# Altium PCB ScopeMag.PcbDoc
Units mil, origin at the board's own origin, x right, y up, seen from the top; angles counter-clockwise.
Board outline 2500 x 1900 mil, 2 copper layers (Top Layer, Bottom Layer); 46 components, 27 nets, 117 pads, 38 vias.
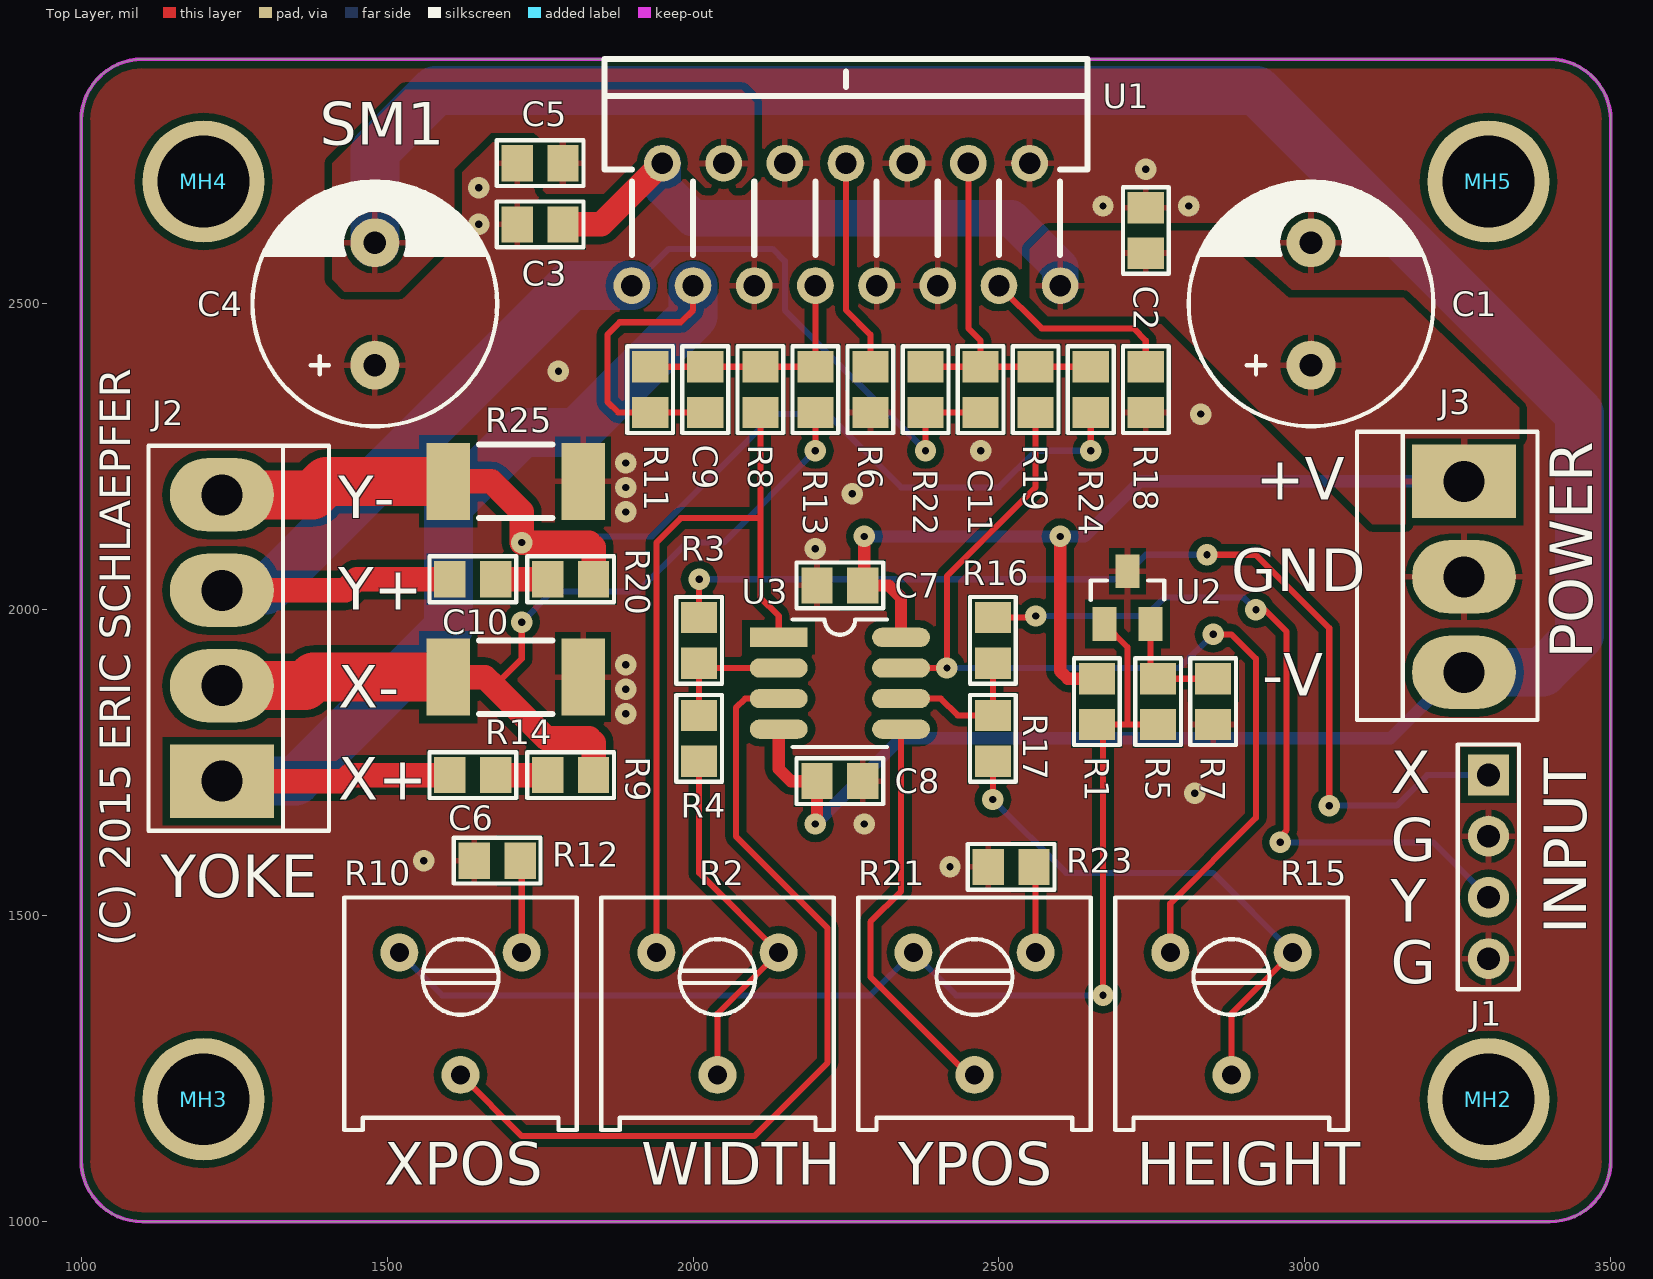
[diagram p0: Top Layer view]
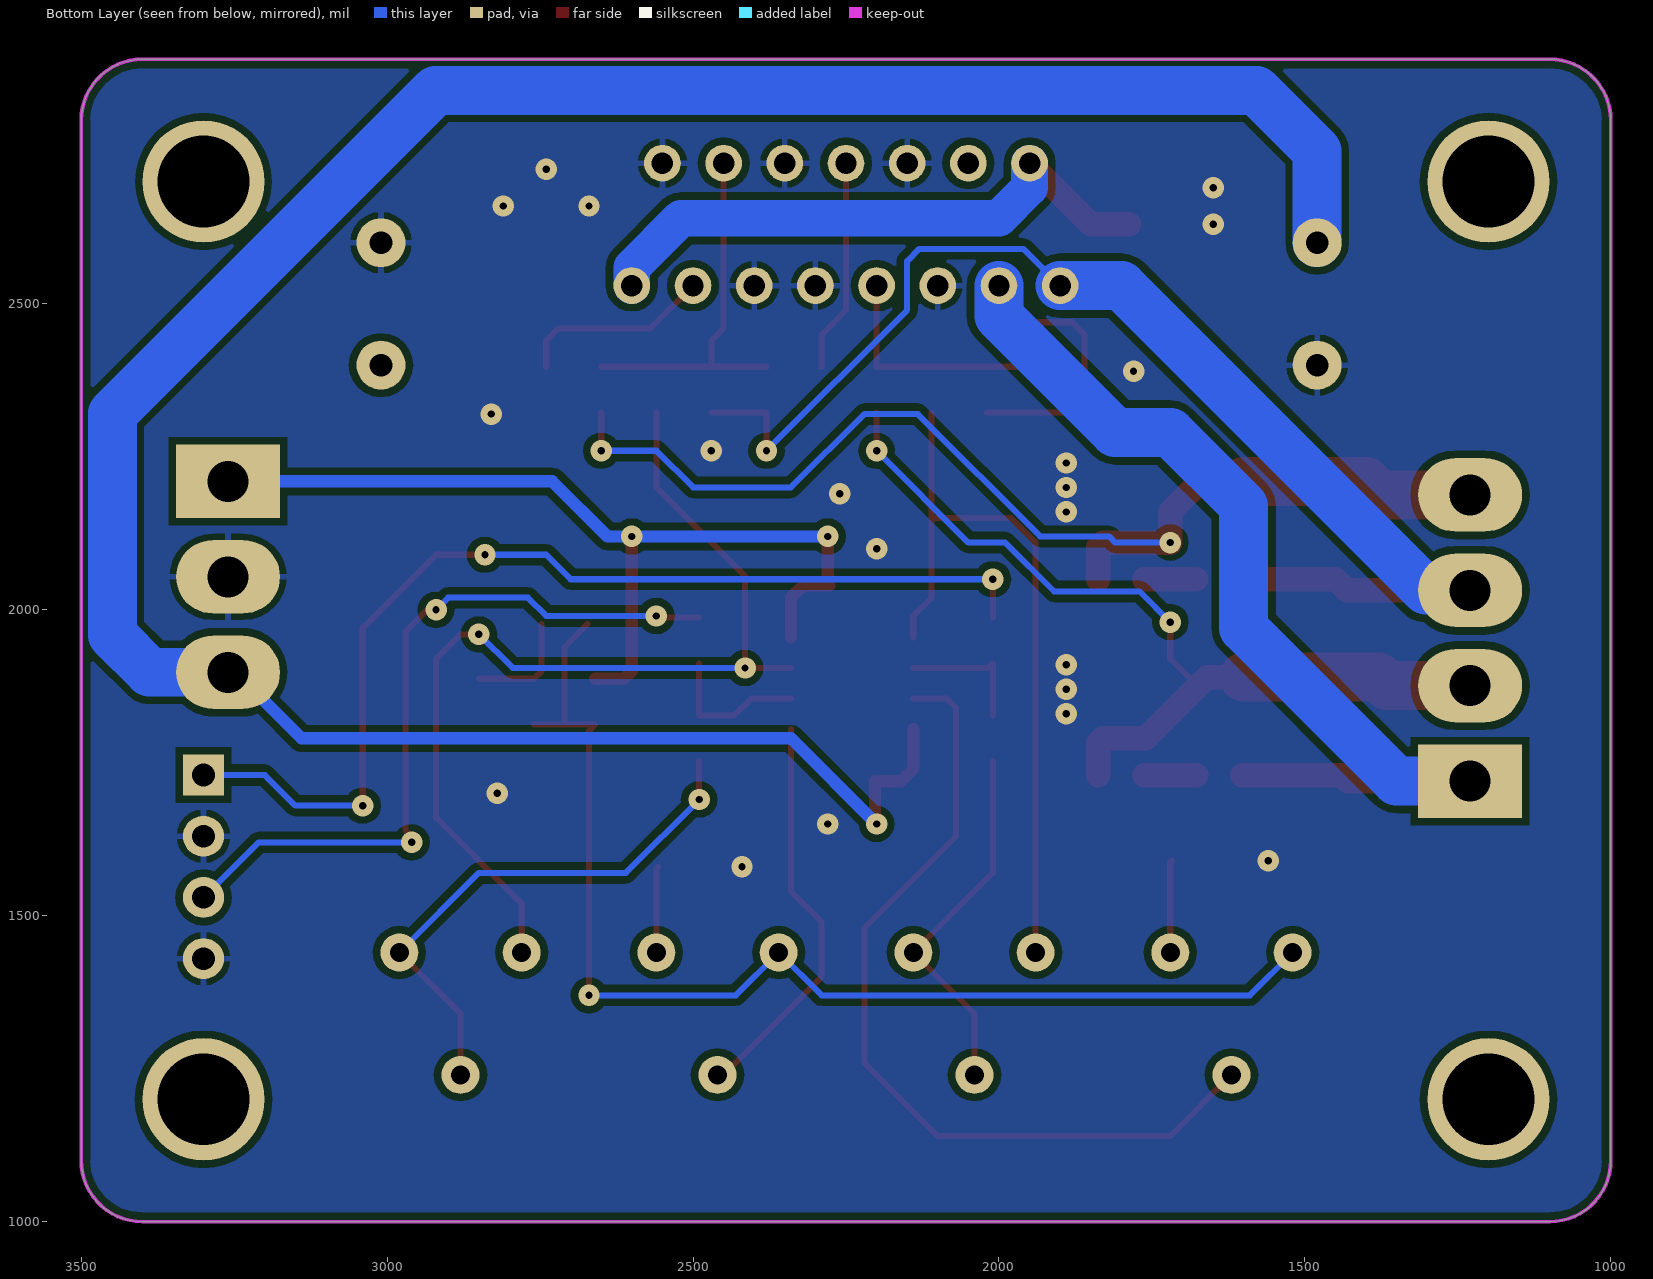
[diagram p1: Bottom Layer view, seen from below]

## Layer stack, top to bottom
Top Solder: solder mask 0.4, Solder Resist, Dk 3.5
Top Layer: signal copper 1.4
Dielectric 1: dielectric 12.6, FR-4, Dk 4.8
Bottom Layer: signal copper 1.4
Bottom Solder: solder mask 0.4, Solder Resist, Dk 3.5

## Board outline
1000,1100 1000,2800 cw(c1100,2800) 1100,2900 3400,2900 cw(c3400,2800) 3500,2800 3500,1100 cw(c3400,1100) 3400,1000 1100,1000 cw(c1100,1100)

## Design rules (kind name [scope] priority, off if disabled: settings)
Clearance Clearance_1 [(InPoly)] p1: gap=12
Clearance Clearance_HV [InNetClass('HV')] p2: gap=80
Clearance [All] p3: gap=8
HoleSize [All] p1: absolutevalues=TRUE maxlimit=150 minlimit=12 maxpercent=80.000 minpercent=20.000
PolygonConnect [InComponent('Q3') or InComponent('Q4') or InComponent('Q5') or InComponent('Q6') or IsVia] p1: connectstyle=Direct reliefconductorwidth=10 reliefentries=4 polygonreliefangle="90 Angle" airgapwidth=10
PolygonConnect PolygonConnect_1 [All] p2: connectstyle=Relief reliefconductorwidth=10 reliefentries=4 polygonreliefangle="90 Angle" airgapwidth=10
RoutingVias [All] p1: holewidth=12 width=35 viastyle="Through Hole" minholewidth=12 minwidth=35 maxholewidth=28 maxwidth=50
ShortCircuit [InComponent('JP1')] p1: allowed=FALSE
ShortCircuit ShortCircuit_1 [All] p2: allowed=FALSE
SolderMaskExpansion [All] p1: expansion=4
Width [All] p1: maxlimit=100 minlimit=10 preferedwidth=10 minimp=50.000000 maximp=50.000000 favimp=50.000000
27 further rules are at their usual default settings.

## Classes and differential pairs
component class ScopeMag: C1 C2 C3 C4 C5 C6 C7 C8 C9 C10 C11 J1 J2 J3 R1 R2 R3 R4 R5 R6 R7 R8 R9 R10 R11 R12 R13 R14 R15 R16 R17 R18 R19 R20 R21 R22 R23 R24 R25 U1 U2 U3

## Components (designator, comment, footprint, x,y, rotation, side; value= is the part's Value field where it differs from the comment)
C1 "Cap Pol2" CAP_R200x400 3010,2500 r90 top
C2 "Cap" G_0805[2012] 2740,2620 r270 top
C3 "Cap" G_0805[2012] 1750,2630 r0 top
C4 "Cap Pol2" CAP_R200x400 1480,2500 r90 top
C5 "Cap" G_0805[2012] 1750,2730 r0 top
C6 "Cap" G_0805[2012] 1640,1730 r180 top
C7 "Cap" G_0805[2012] 2240,2040 r0 top
C8 "Cap" G_0805[2012] 2240,1720 r0 top
C9 "Cap" G_0805[2012] 2020,2360 r90 top
C10 "Cap" G_0805[2012] 1640,2050 r180 top
C11 "Cap" G_0805[2012] 2470,2360 r90 top
J1 "CON4" HDR4S 3300,1730 r0 top
J2 "CON4" HDR4S156 1230,1720 r180 top
J3 "CON3" HDR3S156 3260,2210 r0 top
MH2 "Comment" M_MTHOLE 3300,1200 r0 top
MH3 "Comment" M_MTHOLE 1200,1200 r0 top
MH4 "Comment" M_MTHOLE 1200,2700 r0 top
MH5 "Comment" M_MTHOLE 3300,2700 r0 top
R1 "Res1" G_0805[2012] 2660,1850 r270 top
R2 "Pot" "POT_TRIM BOURNS 3386F" 2040,1340 r0 top
R3 "Res1" G_0805[2012] 2010,1950 r270 top
R4 "Res1" G_0805[2012] 2010,1790 r270 top
R5 "Res1" G_0805[2012] 2760,1850 r90 top
R6 "Res1" G_0805[2012] 2290,2360 r90 top
R7 "Res1" G_0805[2012] 2850,1850 r270 top
R8 "Res1" G_0805[2012] 2110,2360 r90 top
R9 "Res1" G_0805[2012] 1800,1730 r0 top
R10 "Pot" "POT_TRIM BOURNS 3386F" 1620,1340 r0 top
R11 "Res1" G_0805[2012] 1930,2360 r270 top
R12 "Res1" G_0805[2012] 1680,1590 r180 top
R13 "Res1" G_0805[2012] 2200,2360 r270 top
R14 "Res1" G_2512 1600,1890 r0 top
R15 "Pot" "POT_TRIM BOURNS 3386F" 2880,1340 r0 top
R16 "Res1" G_0805[2012] 2490,1950 r270 top
R17 "Res1" G_0805[2012] 2490,1790 r270 top
R18 "Res1" G_0805[2012] 2740,2360 r90 top
R19 "Res1" G_0805[2012] 2560,2360 r90 top
R20 "Res1" G_0805[2012] 1800,2050 r0 top
R21 "Pot" "POT_TRIM BOURNS 3386F" 2460,1340 r0 top
R22 "Res1" G_0805[2012] 2380,2360 r270 top
R23 "Res1" G_0805[2012] 2520,1580 r180 top
R24 "Res1" G_0805[2012] 2650,2360 r270 top
R25 "Res1" G_2512 1600,2210 r0 top
U1 "LM4765" LM4765 2250,2630 r0 top
U2 "TL431" G_SOT23 2710,2020 r0 top
U3 "OpAmpDual" G_SO8 2240,1880 r0 top

## Footprints (in the part's own frame and the unit in brackets; to place one, negate y for a bottom-side part, rotate by r counter-clockwise, add the part's x,y. Pads: shape width x height; smd on the part's side, far side on the other; paste and mask are expansions set on the pad)
CAP_R200x400 [mil]
  round 80 hole 37: 1(-100,0) 2(100,0)
  silkscreen extent -200,-200 200,200, body extent -200,-200 200,200, height 800
G_0805[2012] [mm] "Generic 0805"
  rect 1.3x1.5 smd: 1(-0.95,0) 2(0.95,0)
  silkscreen extent -1.8,-0.95 1.8,0.95, body extent -1,-0.6 1,0.6
G_2512 [mm]
  rect 1.8x3.2 smd: 1(0,0) 2(5.6,0)
  silkscreen extent 1.27,-1.52 4.32,1.52, body extent -0.38,-1.52 5.97,1.52
G_SO8 [mm]
  rect 2.4x0.8 smd: 1(-2.54,1.905)
  oval 2.4x0.8 smd: 2(-2.54,0.635) 3(-2.54,-0.635) 4(-2.54,-1.905) 5(2.54,-1.905) 6(2.54,-0.635) 7(2.54,0.635) 8(2.54,1.905)
  silkscreen extent -1.96,-2.64 1.96,2.65, body extent -2.03,-2.54 2.03,2.54
G_SOT23 [mm]
  rect 1x1.4 smd: 1(-0.95,-1.1) 2(0.95,-1.1) 3(0,1.1)
  silkscreen extent -1.52,-0.1 1.52,0.71, body extent -1.45,-0.64 1.45,0.64
HDR3S156 [mil]
  rect 170x120 hole 67: 1(0,0)
  oval 170x120 hole 67: 2(0,-156) 3(0,-312)
  silkscreen extent -175,-390 120,81
HDR4S [mil]
  rect 67x67 hole 37: 1(0,0)
  round 67 hole 37: 2(0,-100) 3(0,-200) 4(0,-300)
  silkscreen extent -50,-350 50,50
HDR4S156 [mil]
  rect 170x120 hole 67: 1(0,0)
  oval 170x120 hole 67: 2(0,-156) 3(0,-312) 4(0,-468)
  silkscreen extent -175,-548 120,81
LM4765 [mil] "15 pin SIP"
  round 60 hole 35: 1(-350,-100) 2(-300,100) 3(-250,-100) 4(-200,100) 5(-150,-100) 6(-100,100) 7(-50,-100) 8(0,100) 9(50,-100) 10(100,100) 11(150,-100) 12(200,100) 13(250,-100) 14(300,100) 15(350,-100)
  silkscreen extent -395,-50 395,270
M_MTHOLE [mil]
  round 200 hole 150: 1(0,0)
"POT_TRIM BOURNS 3386F" [mil]
  round 62 hole 31: 1(-100,100) 2(100,100) 3(0,-100)
  silkscreen extent -190,-190 190,190, body extent -190,-190 190,190

## Part data
C1 C4: library part CapP, "Polarized Capacitor"
C2 C3 C5 C6 C7 C8 C9 C10 C11: "Capacitor"
J1 J2: "Connector, 4 pin"
J3: "Connector, 3 pin"
R1 R3 R4 R5 R6 R7 R8 R9 R11 R12 R13 R14 R16 R17 R18 R19 R20 R22 R23 R24 R25: library part Res, "Resistor"
R2 R10 R15 R21: "Variable Resistor"
U2: "Adjustable Shunt Reg"
U3: "Generic Dual Op Amp"

## Via types
v1: diameter 35, hole 12, Top Layer to Bottom Layer, 38 vias

## Nets (pads, with @x,y where several pads share a name; then routed paths per layer and width w, separated by ;. In a path a pad name is that pad's centre, name@x,y a point inside that pad or via, vN(x,y) a via of type N, cw(c..) or ccw(c..) an arc to the next point about the centre after c; other vN are vias at no path point)
3V0: R1.2 R5.1 R10.1 R21.1 U2.1 | length 1963.3
  Top Layer w10: v1(2670,1370) 2670,1802.6 R1.2 2710,1812.6 ; U2.1 2710,1939.29 2710,1812.6 ; R5.1 2710,1812.6
  Bottom Layer w10: R10.1 1590,1370 2290,1370 R21.1 2430,1370 v1(2670,1370)
GND: C1.2 C2.1 C3.1 C4.1 C5.1 C7.1 C8.2 J1.2 J1.4 J3.2 R6.1 R7.2 R12.2 R14.2 R18.1 R23.2 R25.2 U1.5 U1.6 U1.9 U1.10 U1.11 U1.14 U2.3
  other v1: 2420,1580 1560,1590 2280,1650 2820,1700 1890,1830 1890,1870 1890,1910 2200,2100 1890,2160 2260,2190 1890,2200 1890,2240 2470,2260 2830,2320 1780,2390 1650,2630 2670,2660 2810,2660 1650,2690 2740,2720
NetC6_1: C6.1 R9.1 | length 85.2
  Top Layer w40: C6.1 R9.1
NetC6_2: C6.2 C9.1 J2.1 R11.2 U1.3 | length 2112.5
  Top Layer w10: U1.3 2000,2490 1980,2470 1880,2470 1860,2450 1860,2340 1877.4,2322.6 R11.2 C9.1
  Top Layer w40: J2.1 1430,1720 1440,1730 1470,1730 ; 1460,1730 C6.2
  Bottom Layer w80: J2.1 1350,1720 1600,1970 1600,2170 1720,2290 1810,2290 2000,2480 U1.3
NetC9_2: C9.2 R8.2 R11.1 R13.1 U1.7 | length 402.6
  Top Layer w10: R11.1 R13.1 U1.7
NetC10_1: C10.1 R20.1 | length 85.2
  Top Layer w40: C10.1 R20.1
NetC10_2: C10.2 C11.1 J2.3 R22.2 U1.1 | length 2097.3
  Top Layer w10: v1(2380,2260) R22.2 C11.1
  Top Layer w40: J2.3 1432,2032 1440,2040 1450,2050 C10.2
  Bottom Layer w10: U1.1 1960,2590 2130,2590 2150,2570 2150,2490 v1(2380,2260)
  Bottom Layer w80: J2.3 1302,2032 1800,2530 U1.1
NetC11_2: C11.2 R19.2 R22.1 R24.1 U1.12 | length 610.9
  Top Layer w10: R22.1 R24.1 ; U1.12 2450,2460 2470,2440 C11.2
NetJ1_1: J1.1 R3.1 | length 1739.7
  Top Layer w10: R3.1 v1(2010,2050) ; v1(2840,2090) 2920,2090 3039.75,1970.25 v1(3039.75,1680)
  Bottom Layer w10: v1@2010,2040 v1(2010,2050) 2700,2050 2740,2090 v1(2840,2090) ; v1(3039.75,1680) 3150,1680 3200,1730 J1.1
NetJ1_3: J1.3 R16.1 | length 1256.6
  Top Layer w10: R16.1 2557.4,1987.4 v1(2560,1990) ; v1(2920,2000) 2934.51,2000 2970,1964.51 2970,1640 v1@2950,1620
  Bottom Layer w10: v1(2560,1990) 2740,1990 2770,2020 2900,2020 v1(2920,2000) ; v1@2950,1620 3210,1620 J1.3
  other v1: 2960,1620
NetJ2_2: J2.2 R9.2 R13.2 R14.1 | length 1492.5
  Top Layer w10: 1675,1875 1720,1920 1720,1960 v1(1720,1980) ; v1(2200,2260) R13.2
  Top Layer w40: R14.1 1660,1890 1675,1875 1760,1790 1830,1790 1837.4,1782.6 R9.2
  Top Layer w80: J2.2 1366,1876 1380,1890 R14.1
  Bottom Layer w10: v1(1720,1980) 1770,2030 1910,2030 1990,2110 2050,2110 v1(2200,2260)
NetJ2_4: J2.4 R20.2 R24.2 R25.1 | length 1897
  Top Layer w10: v1(2650,2260) R24.2
  Top Layer w40: R25.1 1670,2210 1720,2160 v1(1720,2110) 1830,2110 1837.4,2102.6 R20.2
  Top Layer w80: J2.4 1378,2188 1400,2210 R25.1
  Bottom Layer w10: v1(1720,2110) 1810,2110 1820,2120 1932.5,2120 2132.5,2320 2220,2320 2340,2200 2500,2200 2560,2260 v1(2650,2260)
NetR2_1: R2.1 R8.1 U3.1 | length 1236.6
  Top Layer w10: R2.1 1940,2110 1980,2150 2110,2150 ; R8.1 2110,2020 2140,1990 U3.1
NetR2_2: R2.2 R2.3 R4.2 | length 607.9
  Top Layer w10: R4.2 2010,1570 R2.2 2040,1340 R2.3
NetR3_2: R3.2 R4.1 U3.2 | length 218.3
  Top Layer w10: R4.1 R3.2 2017.6,1905 U3.2
NetR5_2: R5.2 R7.1 U2.2 | length 184.5
  Top Layer w10: U2.2 2747.4,1900 R5.2 R7.1
NetR6_2: R6.2 U1.8 | length 349.2
  Top Layer w10: U1.8 2250,2490 2290,2450 R6.2
NetR10_2: R10.2 R12.1 | length 151.1
  Top Layer w10: R12.1 1720,1587.4 R10.2
NetR10_3: R10.3 U3.3 | length 1409.5
  Top Layer w10: R10.3 1720,1140 2100,1140 2220,1260 2220,1480 2070,1630 2070,1840 2085,1855 U3.3
NetR15_1: R15.1 R19.1 U3.7 | length 1649.1
  Top Layer w10: U3.7 v1(2415,1905) 2415,2055 2560,2200 R19.1 ; R15.1 2780,1520 2920,1660 2920,1920 2880,1960 v1(2850,1960)
  Bottom Layer w10: v1@2410,1910 v1@2420,1900 ; v1(2415,1905) 2795,1905 v1(2850,1960)
NetR15_2: R15.2 R15.3 R17.2 | length 897.6
  Top Layer w10: v1(2490,1690) R17.2 ; R15.3 2880,1340 R15.2
  Bottom Layer w10: v1(2490,1690) 2610,1570 2850,1570 R15.2
NetR16_2: R16.2 R17.1 U3.6 | length 246.6
  Top Layer w10: U3.6 2405,1855 2432.6,1827.4 R17.1 R16.2
NetR18_2: R18.2 U1.13 | length 319.9
  Top Layer w10: U1.13 2570,2460 2720,2460 2740,2440 R18.2
NetR21_2: R21.2 R23.1 | length 141.1
  Top Layer w10: R23.1 2560,1577.4 R21.2
NetR21_3: R21.3 U3.5 | length 662
  Top Layer w10: U3.5 2340,1540 2290,1490 2290,1400 2450,1240 R21.3
VCC: C1.1 C2.2 C3.2 C7.2 J3.1 R1.1 U1.2 U1.15 U3.8 | length 2497.3
  Top Layer w20: v1(2280,2120) 2280,2042.6 C7.2 2320,2040 2340,2020 U3.8 ; v1(2600,2120) 2600,1900 2612.6,1887.4 R1.1
  Top Layer w40: C3.2 1850,2630 U1.2
  Bottom Layer w20: v1(2280,2120) v1(2600,2120) 2640,2120 2730,2210 J3.1
  Bottom Layer w60: U1.2 1950,2690 2000,2640 2520,2640 2600,2560 U1.15
VEE: C4.2 C5.2 C8.1 J3.3 U1.4 U3.4 | length 4324.7
  Top Layer w20: U3.4 2140,1740 2160,1720 C8.1 2202.6,1652.6 v1(2200,1650)
  Bottom Layer w20: v1(2200,1650) 2340,1790 3140,1790 3248,1898 J3.3
  Bottom Layer w80: C4.2 1480,2750 1579,2849 2921,2849 3449,2321 3449,1959 3388,1898 J3.3
pads on no net: MH2.1 MH3.1 MH4.1 MH5.1

## Polygon pours and split planes (outlines as drawn)
VEE on Top Layer "VEE" (solid, pour order 4): 1430,2520 1520,2520 1610,2610 1610,2680 1610,2720 1670,2780 1740,2780 1750,2770 1750,2690 1760,2680 1880,2680 1900,2680 1950,2730 1980,2730 2020,2690 2080,2690 2100,2710 2100,2830 2080,2850 1550,2850 1530,2850 1410,2730 1410,2540
GND on Top Layer "GNDT" (solid, pour order 6): 1000,1000 1000,2900 3500,2900 3500,1000
VCC on Top Layer "VCC1" (solid, pour order 2): 3350,2140 3110,2140 2770,2480 2580,2480 2550,2510 2550,2590 2580,2620 2850,2620 2973.75,2510 3161.43,2510 3350,2330
GND on Bottom Layer "GNDB" (solid, pour order 8): 1000,1000 1000,2900 3500,2900 3500,1000 1000,1000

## Keep-outs
Keep-Out Layer:
  the board outline again, w6

## Silkscreen, mask and mechanical layers (free items; w line width, h text height)
Top Overlay:
  text "SM1" at 1390,2760 h70
  text "+V" at 2920,2180 h70
  text "Y-" at 1420,2150 h70
  text "GND" at 2880,2030 h70
  text "Y+" at 1420,2000 h70
  text "POWER" at 3470,1920 h70 r90
  text "-V" at 2930,1860 h70
  text "X-" at 1420,1840 h70
  text "X" at 3140,1700 h70
  text "X+" at 1420,1690 h70
  text "G" at 3140,1590 h70
  text "YOKE" at 1130,1530 h70
  text "Y" at 3140,1490 h70
  text "INPUT" at 3460,1470 h70 r90
  text "(C) 2015 ERIC SCHLAEPFER" at 1080,1450 h50 r90
  text "G" at 3140,1390 h70
  text "XPOS" at 1495,1060 h70
  text "WIDTH" at 1915,1060 h70
  text "YPOS" at 2335,1060 h70
  text "HEIGHT" at 2725,1060 h70